# Altium PCB ATmega4809_Curiosity_Nano.PcbDoc (part 2 of 2)
Units mm, origin at the board's own origin, x right, y up, seen from the top; angles counter-clockwise.
Board outline 83.82 x 20.32 mm, 4 copper layers (Top Layer, Gnd Plane, Pwr Plane, Bottom Layer), stack 1.574 mm thick; 77 components, 102 nets, 422 pads, 194 vias.
Unrouted connection lines stored in the file: 1.
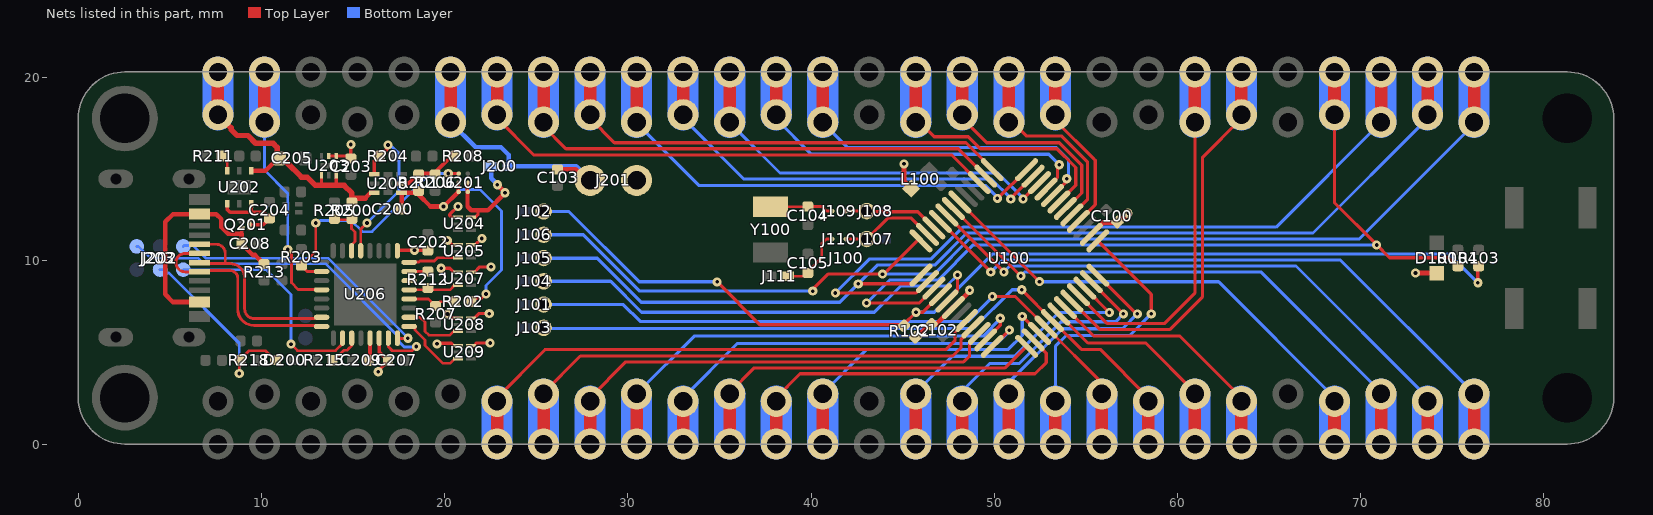
[diagram p4: the nets of this part, all layers, seen from the top]

## Via types
v1: diameter 0.5, hole 0.2, Top Layer to Bottom Layer, 184 vias
v2: diameter 0.5, hole 0.2, Top Layer to Bottom Layer, tented both sides, 8 vias
v3: diameter 0.5, hole 0.2, Top Layer to Bottom Layer, tented top, 2 vias

## Nets (pads, with @x,y where several pads share a name; then routed paths per layer and width w, separated by ;. In a path a pad name is that pad's centre, name@x,y a point inside that pad or via, vN(x,y) a via of type N, cw(c..) or ccw(c..) an arc to the next point about the centre after c; other vN are vias at no path point) (continued)
NetR211_1: R211.1 U202.3 | length 0.9
  Top Layer w0.15: R211.1@7.813,15.725 7.813,15.666 8.135,15.344 U202.3@8.135,14.912
PA0_USART0_TX: J100.7 U100.44 | length 27.6
  Top Layer w0.175: J100.7@22.86,2.54 25.458,5.138 25.489,5.169 47.38,5.169 47.857,5.647 47.857,6.127 47.931,6.201 U100.44@48.479,6.748
PA1_USART0_RX: J100.8 U100.45 | length 25.2
  Top Layer w0.175: J100.8@25.4,2.8 27.413,4.813 47.749,4.813 48.182,5.246 48.182,5.699 48.832,6.349 U100.45@48.832,6.395
PA2_I2C_SDA: J100.9 U100.46 | length 23.1
  Top Layer w0.175: J100.9@27.94,2.54 29.888,4.488 48.332,4.488 48.657,4.813 48.657,5.512 U100.46@49.186,6.041
PA3_I2C_SCL: J100.10 U100.47 | length 23.1
  Top Layer w0.175: U100.47@49.54,5.688 50.334,6.482 v1(50.334,6.875)
  Bottom Layer w0.175: J100.10@30.48,2.743 30.48,2.765 33.615,5.9 49.4,5.9 v1@50.367,6.867
PA4_SPI_MOSI: J100.11 U100.48 | length 20.7
  Top Layer w0.175: U100.48@49.893,5.334 49.941,5.334 v1(50.83,6.223)
  Bottom Layer w0.175: J100.11@33.02,2.54 35.974,5.494 50.158,5.494 v1@50.858,6.195
PA5_SPI_MISO: J100.12 U100.1 | length 17.5
  Top Layer w0.175: J100.12@35.56,2.54 J100.12@35.56,2.743 35.56,2.818 36.904,4.163 50.595,4.163 U100.1@51.767,5.334
PA6_SPI_SCK: J100.13 U100.2 | length 17.1
  Top Layer w0.175: J100.13@38.1,2.54 39.398,3.838 52.229,3.838 52.845,4.454 52.845,4.963 U100.2@52.12,5.688
PA7_SPI_SS: J100.14 U100.3 | length 14.6
  Top Layer w0.175: v1(51.53,6.975) 51.54,6.975 U100.3@52.474,6.041
  Bottom Layer w0.175: J100.14@40.64,2.743 40.64,2.765 43.044,5.169 50.769,5.169 51.53,5.93 v1(51.53,6.975)
PB0_USART3_TX: J100.20 J101.2 U100.4 | length 34.2
  Top Layer w0.15: J101.2@25.4,7.62 J101.2@25.41,7.61
  Top Layer w0.175: v1(49.9,8.056) 51.166,8.056 U100.4@52.828,6.395 55.88,3.342 J100.20@55.88,2.743 J100.20@55.88,2.54
  Bottom Layer w0.175: J101.2@25.4,7.62 29.75,7.62 30.67,6.7 47.442,6.7 48.584,6.7 49.9,8.016 v1(49.9,8.056)
PB1_USART3_RX: J100.21 J103.2 U100.5 | length 36.3
  Top Layer w0.175: v1(51.504,8.425) U100.5@53.181,6.748 54.76,5.169 55.791,5.169 J100.21@58.42,2.54
  Bottom Layer w0.175: J103.2@25.4,6.35 25.432,6.318 48.873,6.318 50.979,8.425 v1(51.504,8.425)
PB2: J100.22 U100.6 | length 9.5
  Top Layer w0.175: U100.6@53.535,7.102 55.114,5.522 58.27,5.522 60.96,2.832 J100.22@60.96,2.743 J100.22@60.96,2.54
PB3: J100.23 U100.7 | length 11.6
  Top Layer w0.175: U100.7@53.888,7.455 55.439,5.905 60.135,5.905 J100.23@63.5,2.54
PB4: J100.34 U100.8 | length 19.1
  Top Layer w0.175: U100.8@54.242,7.809 55.796,6.254 59.579,6.254 61.38,8.055 61.38,15.66 J100.34@63.5,17.78
PB5: J100.35 U100.9 | length 17.2
  Top Layer w0.175: U100.9@54.595,8.162 56.178,6.579 59.292,6.579 60.96,8.247 J100.35@60.96,17.78
PC0_USART1_TX: J100.16 U100.10 | length 14.6
  Top Layer w0.175: U100.10@54.949,8.516 54.962,8.516 v1(56.291,7.187) ; v1@56.291,7.112 v1@56.291,7.174
  Bottom Layer w0.175: J100.16@45.72,2.54 J100.16@45.72,2.743 45.72,2.82 47.7,4.8 51.13,4.8 53.517,7.187 v1(56.291,7.187)
PC1_USART1_RX: J100.17 U100.11 | length 13.6
  Top Layer w0.175: U100.11@55.302,8.87 57.053,7.119 v1(57.053,7.112)
  Bottom Layer w0.175: J100.17@48.26,2.337 48.26,2.902 49.758,4.4 51.37,4.4 53.655,6.685 56.626,6.685 v1(57.053,7.112)
PC2: J100.18 U100.12 | length 12.2
  Top Layer w0.175: U100.12@55.667,9.223 U100.12@55.656,9.223 57.767,7.112 v1(57.815,7.112)
  Bottom Layer w0.175: J100.18@50.8,2.743 50.8,3.37 53.73,6.3 57.003,6.3 v1(57.815,7.112)
PC3: J100.19 U100.13 | length 14.2
  Top Layer w0.175: U100.13@55.656,11.097 58.577,8.176 v1(58.577,7.112)
  Bottom Layer w0.175: J100.19@53.34,2.337 53.34,5.334 53.936,5.93 57.395,5.93 v1(58.577,7.112)
PC4: J100.38 U100.16 | length 7.1
  Top Layer w0.175: J100.38@53.34,17.983 53.34,17.668 55.439,15.569 55.439,15.567 55.514,15.492 55.514,13.076 U100.16@54.595,12.158
PC5: J100.39 U100.17 | length 8.5
  Top Layer w0.175: J100.39@50.8,17.78 51.755,16.825 53.667,16.825 55.1,15.392 55.1,13.369 U100.17@54.242,12.511
PC6: J100.40 U100.18 | length 10.3
  Top Layer w0.175: J100.40@48.26,17.78 49.59,16.45 53.558,16.45 54.775,15.233 54.775,13.711 53.929,12.865 U100.18@53.888,12.865
PC7: J100.41 U100.19 | length 12.1
  Top Layer w0.175: J100.41@45.72,17.78 46.722,16.778 48.594,16.778 49.247,16.125 53.423,16.125 54.366,15.183 54.45,15.098 54.45,14.134 U100.19@53.535,13.218
PD0_AIN0: J100.43 U100.20 | length 16.7
  Top Layer w0.175: U100.20@53.181,13.572 54.012,14.403 54.012,14.507 53.989,14.507 53.968,14.487 v1(53.962,14.487)
  Bottom Layer w0.175: J100.43@40.64,17.577 40.64,17.535 41.975,16.2 53.375,16.2 54.055,15.52 54.055,14.552 54.014,14.512 53.989,14.487 53.968,14.487 v1(53.962,14.487)
PD1_AIN1: J100.44 U100.21 | length 18.1
  Top Layer w0.175: U100.21@52.828,13.925 53.455,14.553 53.455,15.155 v1(53.552,15.252)
  Bottom Layer w0.175: J100.44@38.1,17.747 40.022,15.825 52.979,15.825 v1(53.552,15.252)
PD2_AIN2: J100.45 U100.22 | length 19
  Top Layer w0.175: v1(51.578,13.387) 52.471,14.279 U100.22@52.474,14.279
  Bottom Layer w0.175: J100.45@35.56,17.545 38.305,14.8 50.2,14.8 51.578,13.422 v1(51.578,13.387)
PD3_TCA0WO3: J100.46 U100.23 | length 21.5
  Top Layer w0.175: v1(50.907,13.375) 50.907,13.419 U100.23@52.12,14.632
  Bottom Layer w0.175: J100.46@33.02,17.78 36.325,14.475 49.85,14.475 50.907,13.418 v1(50.907,13.375)
PD4_TCA0WO4: J100.47 U100.24 | length 23.9
  Top Layer w0.175: v1(50.174,13.418) 50.199,13.418 U100.24@51.767,14.986
  Bottom Layer w0.175: J100.47@30.48,17.78 J100.47@30.48,17.577 30.48,17.523 33.891,14.112 49.537,14.112 v1@50.203,13.447
PD5_AIN5: J100.48 U100.25 | length 23.1
  Top Layer w0.175: J100.48@27.94,17.78 29.267,16.453 48.46,16.453 49.893,15.019 U100.25@49.893,14.986
PD6_AIN6: J100.49 U100.26 | length 25.3
  Top Layer w0.175: J100.49@25.4,17.342 26.617,16.125 48.047,16.125 U100.26@49.54,14.632
PD7_AIN7: J100.50 U100.27 | length 27.8
  Top Layer w0.175: J100.50@22.86,17.78 24.855,15.785 47.68,15.785 U100.27@49.22,14.245
PE0: J100.25 U100.30 | length 24.9
  Top Layer w0.175: U100.30@48.125,13.218 v1(52.474,8.87)
  Bottom Layer w0.175: v1(52.474,8.87) 62.25,8.87 J100.25@68.58,2.54
PE1: J100.26 U100.31 | length 28
  Top Layer w0.175: U100.31@47.772,12.865 v1(51.458,9.178)
  Bottom Layer w0.175: v1@51.412,9.132 v1(51.458,9.178) 51.68,9.4 64.55,9.4 71.12,2.83 J100.26@71.12,2.743 J100.26@71.12,2.54
PE2: J100.27 U100.32 | length 30.8
  Top Layer w0.175: U100.32@47.418,12.511 v1(50.529,9.4)
  Bottom Layer w0.175: v1@50.45,9.321 v1(50.529,9.4) 50.854,9.725 66.475,9.725 J100.27@73.66,2.54
PE3: J100.28 U100.33 | length 33.9
  Top Layer w0.175: U100.33@47.065,12.158 49.816,9.406 v1(49.816,9.39)
  Bottom Layer w0.175: v1@49.732,9.306 v1(49.816,9.39) 50.476,10.05 68.893,10.05 J100.28@76.2,2.743 J100.28@76.2,2.54
PF0: J108.2 J109.1 U100.34 | length 5.2
  Top Layer w0.175: J109.1@41.903,12.722 J108.2@43.04,12.722 43.077,12.685 45.83,12.685 U100.34@46.711,11.804
PF0_TOSC1: C104.2 J109.2 Y100.1 | length 3.4
  Top Layer w0.15: Y100.1@37.793,12.956 39.8,12.956 C104.2@39.803,12.953 ; C104.2@39.825,12.976 40.587,12.976 40.841,12.722 J109.2@41.153,12.722
PF1: J107.2 J110.1 U100.35 | length 5.3
  Top Layer w0.175: J110.1@41.903,11.197 J107.2@43.04,11.197 44.183,12.34 45.468,12.34 U100.35@46.358,11.45
PF1_TOSC2: C105.1 J110.2 J111.1 | length 3.7
  Top Layer w0.15: J111.1@38.743,9.166 39.571,9.166 39.825,9.42 40.587,10.182 40.587,10.944 40.84,11.197 J110.2@41.153,11.197
PF2: J100.29 J106.2 U100.36 | length 59.1
  Top Layer w0.175: v1(40.09,8.353) 40.09,8.453 40.92,9.282 v1(43.9,9.282) 43.974,9.282 45.852,11.16 45.94,11.16 U100.36@46.004,11.097
  Bottom Layer w0.175: J106.2@25.4,11.43 27.565,11.43 30.642,8.353 v1(40.09,8.353) ; v1(43.9,9.282) 43.972,9.282 46.717,9.282 48.635,11.2 69.925,11.2 76.2,17.475 J100.29@76.2,17.577 J100.29@76.2,17.78
PF3: J100.30 J105.2 U100.37 | length 57
  Top Layer w0.175: v1(42.58,8.75) 45.531,8.75 U100.37@46.004,9.223
  Bottom Layer w0.175: J105.2@25.4,10.16 25.41,10.15 28.325,10.15 30.725,7.75 41.58,7.75 v1(42.58,8.75) 43.605,9.775 46.75,9.775 48.5,11.525 67.405,11.525 J100.30@73.66,17.78
PF4: J100.31 U100.38 | length 38.9
  Top Layer w0.175: v1(41.33,8.249) 45.737,8.249 U100.38@46.358,8.87
  Bottom Layer w0.175: v1(41.33,8.249) 43.181,10.1 46.54,10.1 48.29,11.85 65.393,11.85 J100.31@71.12,17.577
PF5_LED0: J100.32 R104.1 U100.39 | length 46
  Top Layer w0.175: v1(43.03,7.7) 45.895,7.7 U100.39@46.711,8.516 ; J100.32@68.58,17.78 68.58,13.175 v1(70.88,10.875) 71.58,10.175 74.781,10.175 R104.1@75.3,9.656
  Bottom Layer w0.175: v1(43.03,7.7) 44.287,8.957 46.94,8.957 48.858,10.875 v1(70.88,10.875)
PF6_SW0_RESET: J102.2 R102.1 R103.1 U100.40 | length 58.5
  Top Layer w0.175: v1@34.9,8.859 v1(34.873,8.859) 37.211,6.521 45.019,6.521 R102.1@45.072,6.468 ; R102.1@45.036,6.506 v1(45.73,7.2) 46.102,7.2 U100.40@47.065,8.162 ; v1(76.405,8.81) R103.1@76.405,9.656
  Bottom Layer w0.175: J102.2@25.4,12.7 26.775,12.7 30.616,8.859 v1(34.873,8.859) ; v1(45.73,7.2) 46.73,7.2 49.917,10.388 74.827,10.388 v1(76.405,8.81)
REG_ADJUST: R201.2 R206.2 R208.1 U200.5 | length 3.4
  Top Layer w0.2: U200.5@17.655,14.225 18.03,14.225 18.58,14.775 19.505,14.775 19.505,14.85 R208.1@20.38,15.725
REG_ENABLE: R204.1 U200.1 U206.13 | length 8.9
  Top Layer w0.15: U206.13@15.416,10.556 15.416,11.736 v1(15.755,12.075)
  Top Layer w0.2: U200.1@16.155,14.725 16.155,15.475 16.405,15.725 R204.1@16.373,15.725 ; R204.1@16.455,15.725 16.455,15.73 16.65,15.925 16.655,15.925 16.848,16.118 16.848,16.275 v1(16.905,16.333)
  Bottom Layer w0.15: v1(15.755,12.075) 17.506,13.826 17.506,15.853 17.151,16.207 17.125,16.207 17,16.333 v1(16.905,16.333)
RESERVED: U206.6
S0_0_RX: R212.1 U206.5 U207.3 | length 2.8
  Top Layer w0.15: U206.5@18.06,8.424 20.28,8.424 20.531,8.675 U207.3@20.729,8.675
S0_2_TX: R212.2 U206.7 | length 1
  Top Layer w0.15: U206.7@18.06,9.424 R212.2@19.055,9.424
S0_3_CLK: U205.3 U206.8 | length 2.8
  Top Layer w0.15: U206.8@18.06,9.937 18.595,9.937 18.659,10 19.43,10 19.605,10.175 U205.3@20.729,10.175
S1_0_TX: U206.1 U209.3 | length 3.9
  Top Layer w0.15: U206.1@18.07,6.42 18.33,6.42 18.376,6.374 18.376,6.231 18.93,5.677 18.93,5.389 19.906,4.413 20.291,4.413 20.554,4.675 U209.3@20.729,4.675
S1_1_RX: U206.2 U208.3 | length 3.5
  Top Layer w0.15: U206.2@18.06,6.924 18.666,6.924 18.93,6.66 18.93,6.156 19.136,5.95 20.28,5.95 20.505,6.175 U208.3@20.729,6.175
S\R\S\T\: J202.6 U206.26 | length 12.5
  Top Layer w0.15: v3(11.609,5.458) 11.967,5.1 13.102,5.1 14.05,5.1 14.465,5.515 14.465,5.55 14.47,5.555 U206.26@14.47,5.695
  Bottom Layer w0.15: J202.6@5.73,9.525 10.245,9.524 11.609,8.16 v3(11.609,5.458)
STATUS_LED: R215.2 U206.27 | length 1.7
  Top Layer w0.15: R215.2@13.93,4.575 13.955,4.575 14.455,5.075 14.5,5.12 14.66,5.12 14.765,5.225 14.933,5.393 U206.27@14.933,5.777
SWCLK: J202.1 U206.31 | length 19.9
  Top Layer w0.15: U206.31@16.924,5.787 16.924,5.316 17.14,5.1 18.224,5.1 v1(18.455,5.331)
  Bottom Layer w0.15: J202.1@3.19,10.795 3.285,10.795 3.93,10.15 6.536,10.15 6.833,9.853 13.496,9.853 17.514,5.835 17.514,5.587 17.792,5.309 18.433,5.309 v1(18.455,5.331)
SWDIO: J202.5 U206.32 | length 14.9
  Top Layer w0.15: U206.32@17.42,5.77 17.975,5.77 v1(17.989,5.784)
  Bottom Layer w0.15: J202.5@5.73,10.795 5.778,10.843 6.267,10.843 6.958,10.153 13.62,10.153 v1(17.989,5.784)
UPDI: J104.2 U100.41 | length 25.8
  Top Layer w0.175: U100.41@47.418,7.809 48,8.391 v1(48,9.233)
  Bottom Layer w0.175: J104.2@25.4,8.89 29.058,8.89 30.748,7.2 43.461,7.2 44.893,8.632 47.399,8.632 v1(48,9.233)
USBD_N: J203.A7 J203.B7 U206.23 | length 13
  Top Layer w0.16: J203.B7@6.665,10.91 6.669,10.914 7.523,10.914 ; U206.23@13.27,6.92 12.946,6.92 12.886,6.86 9.59,6.86 ; J203.A7@6.725,9.85 cw(c6.725,9.91) 6.665,9.91 ccw(c6.725,9.91) J203.A7@6.725,9.85 ; J203.A7@6.725,9.85 8.025,9.85 ; 7.522,10.914 cw(c7.522,10.414) 8.022,10.414 ; 7.522,10.914 cw(c7.522,10.414) 8.022,10.414 ; 8.022,10.414 8.022,9.852 8.025,9.85 ; 8.025,9.85 8.296,9.85 cw(c8.296,9.063) 9.083,9.063 9.083,7.366 ; 9.083,7.366 ccw(c9.59,7.366) 9.59,6.86 ; 9.083,7.366 ccw(c9.59,7.366) 9.59,6.86
USBD_P: J203.A6 J203.B6 U206.24 | length 15.3
  Top Layer w0.16: 5.327,9.912 cw(c5.827,9.912) 5.827,10.412 J203.A6@6.665,10.412 ; U206.24@13.27,6.42 12.946,6.42 12.886,6.48 9.59,6.48 ; 5.827,9.408 cw(c5.827,9.908) 5.327,9.908 ccw(c5.827,9.908) 5.827,9.408 ; 5.827,9.408 6.665,9.408 J203.B6@6.665,9.41 ; J203.B6@6.665,9.41 cw(c6.725,9.41) J203.B6@6.725,9.47 ; J203.B6@6.665,9.41 cw(c6.725,9.41) J203.B6@6.725,9.47 ; J203.B6@6.725,9.47 8.296,9.47 ; 8.296,9.47 cw(c8.296,9.063) 8.703,9.063 ; 8.296,9.47 cw(c8.296,9.063) 8.703,9.063 ; 8.703,7.366 ccw(c9.59,7.366) 9.59,6.48 ; 8.703,7.366 ccw(c9.59,7.366) 9.59,6.48 ; 8.703,7.366 8.703,9.063
V\O\F\F\: J100.55 U206.20 | length 11.2
  Top Layer w0.15: v1(11.433,10.628) 11.433,10.573 11.635,10.371 11.635,8.815 12.003,8.447 12.873,8.447 12.88,8.439 13.251,8.439 U206.20@13.27,8.42
  Bottom Layer w0.15: J100.55@10.16,17.577 10.16,14.958 11.433,13.686 v1(11.433,10.628)
VBUS: C208.1 J203.A4/B9 J203.B4/A9 Q201.2 R213.1 | length 13.6
  Top Layer w0.2: 8.927,11.475 Q201.2@8.927,11.715
  Top Layer w0.25: J203.B4/A9@6.675,7.76 6.665,7.76 5.16,7.76 4.74,8.18 4.74,12.131 5.169,12.56 6.665,12.56 7.528,12.56 7.813,12.275 7.813,11.832 8.171,11.475 8.927,11.475 C208.1@8.927,10.94 ; C208.1@8.918,10.931 8.918,10.912 9.067,10.763 9.085,10.763 9.523,10.325 9.644,10.325 9.976,9.992 9.976,9.974 10.121,9.829 R213.1@10.139,9.829
VBUS_ADC: R200.2 R205.2 U206.14 | length 2.8
  Top Layer w0.15: R205.2@13.979,12.25 14.916,12.25 14.916,11.764 15.105,11.575 15.105,11.068 14.916,10.879 U206.14@14.916,10.556
VBUS_DELAYED: C204.2 Q201.3 U202.4 U202.6 | length 4.5
  Top Layer w0.2: U202.4@8.135,13.129 8.135,13.054 8.135,12.803 8.286,12.652 10.108,12.652 10.266,12.494 10.266,12.476 C204.2@10.415,12.327 ; Q201.3@9.41,11.975 10.082,11.975 10.266,12.16 10.266,12.178 C204.2@10.415,12.327 ; U202.6@9.435,13.129 9.435,12.669 9.437,12.667 ; C204.2@10.434,12.327 C204.2@10.415,12.327
VCC_EDGE: C103.2 J100.51 J200.2 J201.1 | length 11.5
  Top Layer w0.25: C103.2@26.162,15.004 27.163,15.004 27.766,14.402 J201.1@27.94,14.402 ; J201.1@27.786,14.402 J201.1@27.94,14.402
  Bottom Layer w0.25: J100.51@20.32,17.577 21.694,16.203 23.074,16.203 23.49,15.787 J200.2@23.49,15.162 27.18,15.162 J201.1@27.94,14.402
VCC_LEVEL: J200.1 U201.A1 U201.B1 U204.6 U205.6 U207.6 U208.6 U209.6 | length 10.5
  Top Layer w0.175: U209.6@21.429,5.375 21.605,5.375 21.755,5.525 v1(22.48,5.525) ; U208.6@21.429,6.875 21.605,6.875 21.855,7.125 v1(22.43,7.125) ; U207.6@21.429,9.375 21.442,9.388 21.627,9.388 21.915,9.675 v1(22.53,9.675) ; U205.6@21.429,10.875 21.68,10.875 v1(22.03,11.225) ; U204.6@21.429,12.375 21.442,12.388 21.677,12.388 21.815,12.525 21.815,12.767
  Top Layer w0.2: U201.A1@21.242,13.775 U201.B1@21.242,14.267
  Top Layer w0.225: 21.242,12.963 21.242,13.759 U201.A1@21.242,13.775
  Top Layer w0.25: 21.254,12.963 21.449,12.767 21.815,12.767 22.362,12.767 23.29,13.695 v1(23.29,13.725) 23.29,13.745 v1(22.876,14.159)
  Bottom Layer w0.25: J200.1@22.54,15.162 22.54,14.525 22.876,14.189 v1(22.876,14.159)
VCC_MCU_CORE: C209.2 U206.29 | length 1.2
  Top Layer w0.2: C209.2@15.88,4.575 15.924,4.619 U206.29@15.924,5.787
VCC_P3V3: C202.2 C203.2 C207.1 D200.2 J202.4 R218.2 U203.1 U203.2 U204.1 U205.1 U206.9 U206.30 U207.1 U208.1 U209.1 | length 21.7
  Top Layer w0.15: v1(8.785,3.855) 8.785,4.511 R218.2@8.848,4.575 8.848,4.625 9.323,5.1 10.214,5.1 10.54,4.774 10.54,4.75 10.715,4.575 D200.2@10.765,4.575
  Top Layer w0.175: U203.2@13.679,15.725 14.779,15.725 C203.2@14.879,15.625 ; v1(19.581,5.475) 19.613,5.507 20.363,5.507 20.483,5.388 20.717,5.388 20.729,5.375 U209.1@20.508,5.375 ; v1(19.804,9.6) 20.28,9.6 20.505,9.375 U207.1@20.729,9.375 ; v1(20.139,11.125) 20.389,10.875 U205.1@20.729,10.875 ; v1(20.155,7.1) 20.38,6.875 U208.1@20.729,6.875 ; U204.1@20.729,12.375 20.383,12.375 20.28,12.478 20.28,12.541 20.712,12.973 v1(20.729,12.973)
  Top Layer w0.2: C203.2@14.879,15.6 v1(14.879,16.357) ; v1(16.375,3.95) 16.375,4.009 16.905,4.539 C207.1@16.905,4.575 ; U206.30@16.424,5.787 16.424,5.031 C207.1@16.88,4.575 ; U206.9@17.416,10.581 v1(18.355,10.581) 18.969,10.581 C202.2@19.055,10.495
  Bottom Layer w0.15: J202.4@4.46,9.525 4.636,9.525 4.813,9.348 4.946,9.348 8.786,5.508 v1(8.785,3.855)
VCC_REGULATOR: C200.2 R201.1 R202.2 U200.4 U201.A2 U201.B2 | length 23.7
  Top Layer w0.175: R202.2@21.579,7.875 21.653,7.95 22.005,7.95 v1(22.255,8.2) ; v1@22.305,8.175 v1@22.33,8.2
  Top Layer w0.2: R201.1@18.58,13.62 R201.1@18.58,13.775 ; U201.A2@20.742,13.775 U201.B2@20.742,14.275
  Top Layer w0.225: v1(19.94,12.973) U201.A2@20.742,13.775
  Top Layer w0.24: C200.2@17.655,13.02 U200.4@17.655,13.725 18.53,13.725 R201.1@18.58,13.775
  Top Layer w0.25: R201.1@18.58,13.62 19.227,12.973 v1(19.94,12.973)
  Bottom Layer w0.15: 20.867,13.9 v1(19.94,12.973) 20.867,13.9 ; 20.867,13.9 21.927,13.9 ; 20.867,13.9 21.927,13.9 ; 21.927,13.9 23.105,12.722 ; 21.927,13.9 23.105,12.722 ; 22.255,8.654 v1(22.255,8.2) 22.255,8.654 ; 22.255,8.654 23.105,9.504 ; 22.255,8.654 23.105,9.504 ; 23.105,9.504 23.105,12.722 ; 23.105,9.504 23.105,12.722
VCC_TARGET: C100.1 C102.2 D100.2 J201.2 L100.1 R102.2 U100.14 U100.42 | length 9.9
  Top Layer w0.27: v1(45.08,15.298) 45.08,14.337 L100.1@45.462,13.955 ; R102.2@45.744,5.796 C102.2@46.506,6.559 ; C102.2@46.575,6.541 46.831,6.541 U100.42@47.746,7.455 ; U100.42@47.772,7.455 48.657,8.341 v1(48.657,8.404) ; U100.14@55.302,11.45 55.947,12.095 56.817,12.095 56.817,12.097 v1@57.34,12.62 ; C100.1@56.789,12.075 56.789,12.077 v1(57.312,12.6) ; v1(73,9.341) 74.162,9.341 D100.2@74.168,9.335
VCC_VBUS: C205.2 J100.56 R200.1 U200.3 U202.1 U203.4 U203.6 | length 14
  Top Layer w0.175: 13.279,14.151 U203.4@13.279,14.675 ; 14.079,14.151 U203.6@14.079,14.675
  Top Layer w0.24: 15.655,13.425 15.955,13.725 U200.3@16.155,13.725
  Top Layer w0.25: U202.1@9.455,14.928 10.218,14.928 C205.2@10.858,15.569
  Top Layer w0.3: J100.56@7.62,17.983 8.34,17.263 8.34,17.171 8.662,16.849 9.26,16.849 9.683,16.426 10.629,16.426 10.858,16.197 10.858,15.597 10.909,15.546 11.067,15.388 11.358,15.388 12.175,14.571 12.493,14.571 12.939,14.125 14.504,14.125 14.929,13.7 R200.1@14.929,13.425 ; R200.1@14.929,13.25 R200.1@14.929,13.425 ; 15.655,13.425 R200.1@14.929,13.425
VTG_ADC: R202.1 R207.2 U206.4 | length 2.7
  Top Layer w0.15: U206.4@18.06,7.924 19.11,7.924 R207.2@19.505,7.529 ; R207.2@19.543,7.561 19.756,7.775 R202.1@20.579,7.775
VTG_EN: R203.1 U201.C2 U206.18 | length 13.3
  Top Layer w0.15: v1(12.965,12.075) 12.965,10.534 R203.1@12.175,9.744 12.499,9.42 U206.18@13.27,9.42 ; v1(20.199,14.775) U201.C2@20.742,14.775
  Bottom Layer w0.15: v1(12.965,12.075) 13.06,12.075 13.195,12.211 14.894,12.211 15.505,11.6 16.03,11.6 19.205,14.775 v1(20.199,14.775)
pads on no net: J100.1 J109.5 J110.5 J202.3 J203.0 J203.A8 J203.B8 Q200.0 Q201.0 U202.0 U203.5

## Polygon pours and split planes (outlines as drawn)
GND on Bottom Layer "Bottom Layer-GND" (solid, remove dead copper, pour order 1): 83.82,20.32 83.82,0 0,0 0,20.32
GND on Top Layer "Top Layer-GND" (solid, remove dead copper, pour order 0): 83.82,20.32 83.82,0 0,0 0,20.32
VCC_P3V3 on Pwr Plane (split plane): 2.54,19.81 21.461,19.81 21.461,14.6 21.461,4.95 21.461,0.51 2.54,0.51 2.524,0.509 2.341,0.518 2.144,0.547 1.95,0.596 1.762,0.663 1.582,0.748 1.411,0.851 1.251,0.969 1.103,1.103 0.969,1.251 0.851,1.411 0.748,1.582 0.663,1.762 0.596,1.95 0.547,2.144 0.518,2.341 0.509,2.524 0.51,2.54 0.51,17.78 0.509,17.796 0.518,17.979 0.547,18.176 0.596,18.37 0.663,18.558 0.748,18.738 0.851,18.909 0.969,19.069 1.103,19.217 1.251,19.351 1.411,19.469 1.582,19.572 1.762,19.657 1.95,19.724 2.144,19.773 2.341,19.802 2.524,19.811
VCC_TARGET on Pwr Plane (split plane): 81.479,19.802 81.676,19.773 81.87,19.724 82.058,19.657 82.238,19.572 82.409,19.469 82.569,19.351 82.717,19.217 82.851,19.069 82.969,18.909 83.072,18.738 83.157,18.558 83.224,18.37 83.273,18.176 83.302,17.979 83.311,17.796 83.31,17.78 83.31,2.54 83.311,2.524 83.302,2.341 83.273,2.144 83.224,1.95 83.157,1.762 83.072,1.582 82.969,1.411 82.851,1.251 82.717,1.103 82.569,0.969 82.409,0.851 82.238,0.748 82.058,0.663 81.87,0.596 81.676,0.547 81.479,0.518 81.296,0.509 81.28,0.51 21.719,0.51 21.719,4.821 24.255,4.821 24.305,4.83 24.347,4.858 24.375,4.9 24.384,4.95 24.384,14.6 24.375,14.65 24.347,14.692 24.305,14.72 24.255,14.729 21.719,14.729 21.719,19.81 81.28,19.81 81.296,19.811
VCC_LEVEL on Pwr Plane (split plane): 24.126,5.079 21.719,5.079 21.719,14.47 24.126,14.47
GND on Gnd Plane (split plane): 81.479,19.802 81.676,19.773 81.87,19.724 82.058,19.657 82.238,19.572 82.409,19.469 82.569,19.351 82.717,19.217 82.851,19.069 82.969,18.909 83.072,18.738 83.157,18.558 83.224,18.37 83.273,18.176 83.302,17.979 83.311,17.796 83.31,17.78 83.31,2.54 83.311,2.524 83.302,2.341 83.273,2.144 83.224,1.95 83.157,1.762 83.072,1.582 82.969,1.411 82.851,1.251 82.717,1.103 82.569,0.969 82.409,0.851 82.238,0.748 82.058,0.663 81.87,0.596 81.676,0.547 81.479,0.518 81.296,0.509 81.28,0.51 2.54,0.51 2.524,0.509 2.341,0.518 2.144,0.547 1.95,0.596 1.762,0.663 1.582,0.748 1.411,0.851 1.251,0.969 1.103,1.103 0.969,1.251 0.851,1.411 0.748,1.582 0.663,1.762 0.596,1.95 0.547,2.144 0.518,2.341 0.509,2.524 0.51,2.54 0.51,17.78 0.509,17.796 0.518,17.979 0.547,18.176 0.596,18.37 0.663,18.558 0.748,18.738 0.851,18.909 0.969,19.069 1.103,19.217 1.251,19.351 1.411,19.469 1.582,19.572 1.762,19.657 1.95,19.724 2.144,19.773 2.341,19.802 2.524,19.811 2.54,19.81 81.28,19.81 81.296,19.811

## Keep-outs
Top Layer:
  region: 39.36,8.619 39.36,9.712 37.176,9.712 37.176,8.619
  region: 38.743,9.906 38.743,13.511 36.843,13.511 36.843,9.906
  lines w0.159: 48.862,7.666 48.927,7.61 ; 49.048,13.003 49.157,13.109 ; 54.242,11.266 54.412,11.083 ; 56.2,13.085 56.336,12.952
Bottom Layer:
  rectangle: 27.94,13.552 30.48,15.252
  region: 23.655,14.69 23.655,15.666 22.282,15.666 22.282,14.69
Keep-Out Layer:
  text "'.Layer_Name'" at 174.01,-104.74 h1.5

## Other copper
Top Layer:
  region net GND: 19.741,6.67 19.768,6.697 19.798,6.702 19.809,6.678 19.821,6.662 19.835,6.642 19.845,6.632 19.863,6.618 19.886,6.613 19.901,6.616 19.912,6.604 19.916,6.584 19.881,6.538 19.756,6.522 19.711,6.568
  region net VTG_ADC: 19.795,7.658 19.774,7.712 19.88,7.706 19.853,7.699 19.831,7.69 19.813,7.675
  region net GND: 18.724,11.343 18.794,11.413 18.825,11.343
  pour cut-out: 38.844,13.425 38.844,10.493 42.186,10.493 42.186,13.425
  text ".ProjectPCBFabRevision" at 209.188,-104.562 h1.5
  text "'.Layer_Name'" at 174.01,-104.74 h1.5
Bottom Layer:
  pour cut-out: 42.344,13.383 42.344,10.548 44.525,10.548 44.525,13.383
  pour cut-out: 25.99,13.356 25.99,5.694 23.875,5.694 23.875,13.356
  text ".ProjectPCBFabRevision" at 209.188,-104.562 h1.5
  text ".ProjectPCBFabRevision" at 209.188,-104.562 h1.5
  text ".ProjectPCBFabRevision" at 209.188,-104.562 h1.5
  text "'.Layer_Name'" at 174.01,-104.74 h1.5
Gnd Plane (plane layer: these items are gaps in the copper):
  text ".ProjectPCBFabRevision" at 209.188,-104.562 h1.5
  text "'.Layer_Name'" at 174.01,-104.74 h1.5
Pwr Plane (plane layer: these items are gaps in the copper):
  lines w0.254: 21.59,0.016 21.59,4.95 ; 21.59,20.32 21.59,14.6 ; 21.59,4.95 21.59,14.6 ; 21.59,4.95 24.255,4.95 24.255,14.6 21.59,14.6
  text ".ProjectPCBFabRevision" at 209.188,-104.562 h1.5
  text "'.Layer_Name'" at 174.01,-104.74 h1.5

## Silkscreen, mask and mechanical layers (free items; w line width, h text height)
Top Overlay:
  lines w0.15: 6.699,3.989 21.364,3.989 ; 6.699,16.306 21.391,16.306 ; 17.525,16.75 18.025,16.75 ; 18.975,16.75 19.475,16.75 ; 19.225,16.5 19.225,17
  text "GND" at 5.497,16.58 h0.9 r90
  text "PD7" at 21.911,16.084 h0.75
  text "PD5" at 26.94,16.074 h0.75
  text "PD3" at 32.02,16.074 h0.75
  text "PD1" at 37.225,16.074 h0.75
  text "GND" at 42.18,16.074 h0.75
  text "PC6" at 47.26,16.074 h0.75
  text "PC4" at 52.34,16.074 h0.75
  text "PF0" at 57.42,16.074 h0.75
  text "PB4" at 62.5,16.074 h0.75
  text "PF5" at 67.58,16.074 h0.75
  text "PF3" at 72.66,16.074 h0.75
  text "PD6" at 24.4,15.677 h0.75
  text "PD4" at 29.48,15.677 h0.75
  text "PD2" at 34.56,15.677 h0.75
  text "PD0" at 39.64,15.677 h0.75
  text "PC7" at 44.72,15.677 h0.75
  text "PC5" at 49.8,15.677 h0.75
  text "PF1" at 55.005,15.677 h0.75
  text "PB5" at 59.96,15.677 h0.75
  text "GND" at 65.04,15.677 h0.75
  text "PF4" at 70.12,15.677 h0.75
  text "PF2" at 75.2,15.677 h0.75
  text "SW0" at 79.391,14.709 h0.75
  text "POWER" at 27.461,12.5 h0.75
  text "LED0" at 72.936,12.452 h0.75
  text "32kHz" at 36.3,9.8 h0.9 r90
  text "C" at 58.59,8.485 h6
  text "PF5" at 73.311,7.4 h0.75
  text "DEBUGGER" at 8.31,6.697 h0.75 r90
  text "ATmega4809" at 55.285,5.555 h1
  text "PS" at 10.66,5.175 h0.75
  text "PF6" at 79.391,5.025 h0.75
  text "'.ProjectTargetName' / CURIOSITY NANO" at 24.816,4.791 h1.35 r90
  text "PA1" at 24.525,3.913 h0.75
  text "PA3" at 29.48,3.913 h0.75
  text "PA5" at 34.56,3.913 h0.75
  text "PA7" at 39.64,3.913 h0.75
  text "PC0" at 44.72,3.913 h0.75
  text "PC2" at 49.8,3.913 h0.75
  text "PB0" at 54.88,3.913 h0.75
  text "PB2" at 59.96,3.913 h0.75
  text "GND" at 65.04,3.913 h0.75
  text "PE1" at 70.245,3.913 h0.75
  text "PE3" at 75.2,3.913 h0.75
  text "PA0" at 21.86,3.534 h0.75
  text "PA2" at 26.94,3.534 h0.75
  text "PA4" at 32.02,3.534 h0.75
  text "PA6" at 37.1,3.534 h0.75
  text "GND" at 42.18,3.534 h0.75
  text "PC1" at 47.385,3.534 h0.75
  text "PC3" at 52.34,3.534 h0.75
  text "PB1" at 57.545,3.534 h0.75
  text "PB3" at 62.5,3.534 h0.75
  text "PE0" at 67.58,3.534 h0.75
  text "PE2" at 72.66,3.534 h0.75
  text "1" at 27.307,2.278 h10
  text "GND" at 5.497,1.34 h0.9 r90
  text ".ProjectPCBFabRevision" at 209.188,-104.562 h1.5
  text "'.Layer_Name'" at 174.01,-104.74 h1.5
Bottom Overlay:
  lines w0.15: 23.815,5.625 23.815,13.42 ; 26.115,5.625 26.115,13.42 ; 27.365,13.42 26.115,13.42 20.54,13.42 20.54,5.625 29.165,5.625 29.165,13.42 28.515,13.42
  lines w0.2: 47.099,10.697 47.099,13.121 ; 47.1,11.909 49.313,14.122 54.722,14.122 ; 55.6,15 54.722,14.122 ; 57.8,15 56.922,14.122 54.722,14.122
  text "GND" at 5.497,18.98 h0.9 r90
  text "VBUS" at 7.995,16.722 h0.75 r90
  text "PD7" at 23.86,16.074 h0.75
  text "PD5" at 28.94,16.074 h0.75
  text "PD3" at 34.02,16.074 h0.75
  text "PD1" at 38.975,16.074 h0.75
  text "GND" at 44.18,16.074 h0.75
  text "PC6" at 49.26,16.074 h0.75
  text "PC4" at 54.34,16.074 h0.75
  text "PF0" at 59.42,16.074 h0.75
  text "PB4" at 64.5,16.074 h0.75
  text "PF5" at 69.58,16.074 h0.75
  text "PF3" at 74.66,16.074 h0.75
  text "D3" at 13.325,15.972 h0.75
  text "GND" at 18.78,15.972 h0.75
  text "VOFF" at 11.535,15.693 h0.75
  text "D0" at 15.865,15.693 h0.75
  text "VTG" at 21.32,15.693 h0.75
  text "PD6" at 26.4,15.677 h0.75
  text "PD4" at 31.48,15.677 h0.75
  text "PD2" at 36.56,15.677 h0.75
  text "PD0" at 41.64,15.677 h0.75
  text "PC7" at 46.72,15.677 h0.75
  text "PC5" at 51.8,15.677 h0.75
  text "PF1" at 56.755,15.677 h0.75
  text "PB5" at 61.96,15.677 h0.75
  text "GND" at 67.04,15.677 h0.75
  text "PF4" at 72.12,15.677 h0.75
  text "PF2" at 77.2,15.677 h0.75
  text "CONNECTIONS" at 26.711,13.774 h0.7
  text "Microchip © 2024" at 82.018,13.061 h2
  text "DEBUGGER" at 20.205,12.397 h0.75 r90
  text "D3" at 23.485,12.335 h0.75
  text "PF6" at 28.848,12.335 h0.75
  text "PF0" at 46.705,12.254 h0.75
  text "TARGET" at 30.265,11.647 h0.75 r90
  text "D2" at 23.485,11.06 h0.75
  text "PF2" at 28.848,11.06 h0.75
  text "PF1" at 46.705,10.825 h0.75
  text "C" at 18.974,10.414 h9.7
  text "D1" at 23.485,9.785 h0.75
  text "PF3" at 28.848,9.785 h0.75
  text "D0" at 23.485,8.51 h0.75
  text "UPDI" at 28.848,8.51 h0.75
  text "CDC" at 21.719,7.985 h0.75 r90
  text "RX" at 23.485,7.235 h0.75
  text "PB0" at 28.848,7.235 h0.75
  text "1" at 62.597,7.024 h5
  text "4" at 36.665,7.021 h5
  text "GND" at 11.5,6.655 h0.75
  text "TX" at 23.485,5.96 h0.75
  text "PB1" at 28.848,5.96 h0.75
  text "" at 17.247,5.918 h5
  text "BOOT" at 11.5,5.41 h0.75
  text "'.ProjectPCBFabNumber' Rev'.ProjectPCBFabRevision'" at 81.718,5.376 h2
  text "CDC" at 14.955,4.825 h0.75
  text "ID" at 10.722,3.913 h0.75
  text "TX" at 15.865,3.913 h0.75
  text "D2" at 20.945,3.913 h0.75
  text "PA1" at 26.275,3.913 h0.75
  text "PA3" at 31.48,3.913 h0.75
  text "PA5" at 36.56,3.913 h0.75
  text "PA7" at 41.64,3.913 h0.75
  text "PC0" at 46.72,3.913 h0.75
  text "PC2" at 51.8,3.913 h0.75
  text "PB0" at 56.88,3.913 h0.75
  text "PB2" at 61.96,3.913 h0.75
  text "GND" at 67.04,3.913 h0.75
  text "PE1" at 71.995,3.913 h0.75
  text "PE3" at 77.2,3.913 h0.75
  text "GND" at 5.497,3.74 h0.9 r90
  text "NC" at 8.245,3.534 h0.75
  text "RX" at 13.325,3.534 h0.75
  text "D1" at 18.28,3.534 h0.75
  text "PA0" at 23.86,3.534 h0.75
  text "PA2" at 28.94,3.534 h0.75
  text "PA4" at 34.02,3.534 h0.75
  text "PA6" at 39.1,3.534 h0.75
  text "GND" at 44.18,3.534 h0.75
  text "PC1" at 49.135,3.534 h0.75
  text "PC3" at 54.34,3.534 h0.75
  text "PB1" at 59.295,3.534 h0.75
  text "PB3" at 64.5,3.534 h0.75
  text "PE0" at 69.58,3.534 h0.75
  text "PE2" at 74.66,3.534 h0.75
  text ".ProjectPCBFabRevision" at 209.188,-104.562 h1.5
  text "'.Layer_Name'" at 174.01,-104.74 h1.5
Top Paste:
  text ".ProjectPCBFabRevision" at 209.188,-104.562 h1.5
  text "'.Layer_Name'" at 174.01,-104.74 h1.5
Bottom Paste:
  text ".ProjectPCBFabRevision" at 209.188,-104.562 h1.5
  text "'.Layer_Name'" at 174.01,-104.74 h1.5
Top Solder:
  text ".ProjectPCBFabRevision" at 209.188,-104.562 h1.5
  text "'.Layer_Name'" at 174.01,-104.74 h1.5
Bottom Solder:
  text ".ProjectPCBFabRevision" at 209.188,-104.562 h1.5
  text "'.Layer_Name'" at 174.01,-104.74 h1.5
Board (M1):
  the board outline again, w0.1
  text "'.Layer_Name'" at 192.01,-104.74 h1.5
Top Assembly:
  text "ASSEMBLY VARIANT:" at 146.01,-88.74 h0.9
  text "'.VariantName'" at 160.26,-88.74 h0.9
  text "DOCUMENT NUMBER:" at 192.26,-96.99 h1.15
  text "'.ProjectPCBAssyNumber'_ASSY-D" at 192.51,-99.99 h1.38
  text ".ProjectPCBAssyRevision" at 209.188,-104.562 h1.5
  text ".ProjectPCBFabRevision" at 209.188,-104.562 h1.5
  text "'.Layer_Name'" at 174.01,-104.74 h1.5
Bottom Assembly:
  text "'.VariantName'" at -76.44,-88.74 h0.9
  text "ASSEMBLY VARIANT:" at -62.19,-88.74 h0.9
  text "DOCUMENT NUMBER:" at -108.44,-96.99 h1.15
  text "'.ProjectPCBAssyNumber'_ASSY-D" at -108.69,-99.99 h1.38
  text ".ProjectPCBAssyRevision" at -125.368,-104.562 h1.5
  text "'.Layer_Name'" at -90.49,-104.74 h1
  text "'.Layer_Name'" at 174.01,-104.74 h1.5
Notes (M4):
  lines w0.1: -2.5,-2.5 86.32,-2.5 86.32,22.82 -2.5,22.82 -2.5,-2.5
Bottom 3D Body:
  text "'.Layer_Name'" at 174.01,-104.74 h1.15
Top 3D Body:
  text "'.Layer_Name'" at 174.01,-104.74 h1.2
Bottom Courtyard:
  text ".ProjectPCBFabRevision" at 209.188,-104.562 h1.5
  text "'.Layer_Name'" at 174.01,-104.74 h1
Top Courtyard:
  text ".ProjectPCBFabRevision" at 209.188,-104.562 h1.5
  text "'.Layer_Name'" at 174.01,-104.74 h1.1
TITLE (M16):
  lines w0.1: 145.51,-87.49 227.33,-87.49 ; 197.51,-79.99 197.51,-82.99 227.33,-82.99 ; 216.05,-104.625 216.05,-103.355 ; 216.05,-103.99 226.21,-103.99 ; 216.21,-102.79 216.21,-101.79 ; 216.21,-102.29 226.21,-102.29 ; 218.59,-104.625 218.59,-103.355 ; 221.13,-104.625 221.13,-103.355 ; 221.21,-102.59 221.21,-101.99 ; 223.67,-104.625 223.67,-103.355 ; 226.21,-104.625 226.21,-103.355 ; 226.21,-102.79 226.21,-101.79 ; 227.33,-82.99 227.33,-82.99
  lines w0.127: -148.59,-50.165 -143.51,-50.165 ; -148.59,10.16 -143.51,10.16 ; -148.59,70.485 -143.51,70.485 ; -85.09,-110.49 -85.09,-105.41 ; -85.09,125.73 -85.09,130.81 ; -21.59,-110.49 -21.59,-105.41 ; -21.59,125.73 -21.59,130.81 ; 41.91,-110.49 41.91,-105.41 ; 41.91,125.73 41.91,130.81 ; 77.47,-105.41 113.03,-105.41 ; 105.41,-110.49 105.41,-105.41 ; 105.41,125.73 105.41,130.81 ; 145.51,-105.41 145.51,-79.99 ; 145.51,-100.99 227.33,-100.99 ; 145.51,-94.99 227.33,-94.99 ; 145.51,-88.99 227.33,-88.99 ; 168.91,-110.49 168.91,-105.41 ; 168.91,125.73 168.91,130.81 ; 173.51,-105.41 173.51,-88.99 ; 191.51,-100.99 191.51,-94.99 ; 204.51,-105.41 204.51,-100.99 ; 212.01,-105.41 212.01,-94.99 ; 227.33,-74.93 227.33,-105.41 ; 227.33,-50.165 232.41,-50.165 ; 227.33,10.16 232.41,10.16 ; 227.33,70.485 232.41,70.485 ; 227.33,-105.41 227.33,-79.99 111.51,-79.99 111.51,-105.41 227.33,-105.41 ; 227.33,-105.41 -143.51,-105.41 -143.51,125.73 227.33,125.73 227.33,-105.41 ; -148.59,-110.49 232.41,-110.49 232.41,130.81 -148.59,130.81 -148.59,-110.49
  lines w0.254: 116.83,116.73 116.83,121.23 116.83,125.73 ; 129.33,116.73 129.33,121.23 129.33,125.73 ; 207.83,116.73 207.83,121.23 207.83,125.73 ; 227.33,121.23 105.83,121.23 ; 105.83,121.23 105.83,125.73 227.33,125.73 227.33,116.73 105.83,116.73 105.83,121.23
  text "1" at -117.314,127.508 h1.78
  text "2" at -53.924,127.508 h1.78
  text "3" at 9.305,127.508 h1.78
  text "4" at 72.974,127.508 h1.78
  text "5" at 136.449,127.508 h1.78
  text "6" at 200.076,127.508 h1.78
  text "REV" at 108.33,122.73 h1.52
  text "ECO" at 118.33,122.73 h1.52
  text "Comments" at 164.83,122.23 h1.52
  text "Date" at 212.83,122.23 h1.52
  text "A" at -146.685,98.476 h1.78
  text "A" at 229.235,98.476 h1.78
  text "B" at -146.685,38.024 h1.78
  text "B" at 229.235,38.024 h1.78
  text "C" at -146.685,-22.301 h1.78
  text "C" at 229.235,-22.301 h1.78
  text "PART NUMBER:" at 198.51,-81.99 h1
  text "'.ProjectpartNumber'" at 210.51,-82.24 h1.5
  text "D" at -146.685,-82.499 h1.78
  text "TITLE:" at 146.51,-82.49 h1.14
  text "D" at 229.235,-82.499 h1.78
  text "'.ProjectTitle'" at 146.51,-86.49 h2.5
  text "PCB Layout Contact:" at 146.51,-90.99 h1.15
  text "GERBER FILE:" at 174.51,-90.99 h1.15
  text ".ProjectContactPCB" at 146.51,-93.99 h1.6
  text "'.Plot_File_Name'" at 174.51,-93.99 h1.5
  text "M" at 114.51,-95.99 h15.24
  text "Project Owner:" at 146.51,-96.99 h1.15
  text "PCB NUMBER:" at 174.51,-96.99 h1.15
  text "DATE:" at 213.21,-96.99 h1.14
  text "Microchip Technology Inc." at 113.28,-99.25 h1.78
  text ".ProjectContactOwner" at 146.51,-99.99 h1.6
  text ".ProjectPCBFabNumber" at 174.51,-99.99 h1.6
  text "'.PRINT_DATE'" at 213.21,-99.99 h1.5
  text "2355 W. Chandler Blvd." at 114.51,-101.99 h1.78
  text "LAYER NAME:" at 174.51,-102.49 h1.14
  text "10mm" at 212.51,-102.59 h0.7
  text "PCB FILE NAME:" at 146.51,-102.74 h1.15
  text "REV:" at 205.26,-102.74 h1.14
  text "400mil" at 212.41,-104.29 h0.7
  text "Chandler, AZ  85224" at 115.51,-104.49 h1.78
  text "'.PCB_FILE_NAME_NO_PATH'" at 146.51,-104.74 h1
  text "1" at -117.314,-108.712 h1.78
  text "2" at -53.924,-108.712 h1.78
  text "3" at 9.305,-108.712 h1.78
  text "4" at 72.974,-108.712 h1.78
  text "5" at 136.449,-108.712 h1.78
  text "6" at 200.076,-108.712 h1.78
Drill Drawing:
  text "DOCUMENT NUMBER:" at 192.26,-96.99 h1.15
  text "'.ProjectPCBFabNumber'_FAB-D" at 192.51,-99.99 h1.38
  text ".ProjectPCBFabRevision" at 209.188,-104.562 h1.5
TITLE MIRROR (M17):
  lines w0.1: -143.51,-87.49 -61.69,-87.49 ; -142.39,-104.625 -142.39,-103.355 ; -142.39,-103.99 -132.23,-103.99 ; -142.39,-102.79 -142.39,-101.79 ; -142.39,-102.29 -132.39,-102.29 ; -139.85,-104.625 -139.85,-103.355 ; -137.39,-102.59 -137.39,-101.99 ; -137.31,-104.625 -137.31,-103.355 ; -134.77,-104.625 -134.77,-103.355 ; -132.39,-102.79 -132.39,-101.79 ; -132.23,-104.625 -132.23,-103.355 ; -113.69,-79.99 -113.69,-82.99 -143.51,-82.99 ; -143.51,-82.99 -143.51,-82.99
  lines w0.127: -148.59,-50.165 -143.51,-50.165 ; -148.59,10.16 -143.51,10.16 ; -148.59,70.485 -143.51,70.485 ; -143.51,-100.99 -61.69,-100.99 ; -143.51,-94.99 -61.69,-94.99 ; -143.51,-88.99 -61.69,-88.99 ; -128.19,-105.41 -128.19,-94.99 ; -120.69,-105.41 -120.69,-100.99 ; -107.69,-100.99 -107.69,-94.99 ; -89.69,-105.41 -89.69,-88.99 ; -85.09,-110.49 -85.09,-105.41 ; -85.09,125.73 -85.09,130.81 ; -61.69,-105.41 -61.69,-79.99 ; -21.59,-110.49 -21.59,-105.41 ; -21.59,125.73 -21.59,130.81 ; 41.91,-110.49 41.91,-105.41 ; 41.91,125.73 41.91,130.81 ; 105.41,-110.49 105.41,-105.41 ; 105.41,125.73 105.41,130.81 ; 168.91,-110.49 168.91,-105.41 ; 168.91,125.73 168.91,130.81 ; 227.33,-50.165 232.41,-50.165 ; 227.33,10.16 232.41,10.16 ; 227.33,70.485 232.41,70.485 ; -143.51,-105.41 227.33,-105.41 227.33,125.73 -143.51,125.73 -143.51,-105.41 ; -143.51,-105.41 -27.69,-105.41 -27.69,-79.99 -143.51,-79.99 -143.51,-105.41 ; -148.59,-110.49 232.41,-110.49 232.41,130.81 -148.59,130.81 -148.59,-110.49
  lines w0.254: -143.51,121.23 -22.01,121.23 ; -124.01,116.73 -124.01,121.23 -124.01,125.73 ; -45.51,116.73 -45.51,121.23 -45.51,125.73 ; -33.01,116.73 -33.01,121.23 -33.01,125.73 ; -22.01,121.23 -22.01,125.73 -143.51,125.73 -143.51,116.73 -22.01,116.73 -22.01,121.23
  text "6" at -116.256,127.508 h1.78
  text "5" at -52.629,127.508 h1.78
  text "4" at 10.846,127.508 h1.78
  text "3" at 74.515,127.508 h1.78
  text "2" at 137.744,127.508 h1.78
  text "1" at 201.134,127.508 h1.78
  text "ECO" at -34.51,122.73 h1.52
  text "REV" at -24.51,122.73 h1.52
  text "Date" at -129.01,122.23 h1.52
  text "Comments" at -81.01,122.23 h1.52
  text "A" at -145.415,98.476 h1.78
  text "A" at 230.505,98.476 h1.78
  text "B" at -145.415,38.024 h1.78
  text "B" at 230.505,38.024 h1.78
  text "C" at -145.415,-22.301 h1.78
  text "C" at 230.505,-22.301 h1.78
  text "PART NUMBER:" at -114.69,-81.99 h1
  text "'.ProjectpartNumber'" at -126.69,-82.24 h1.5
  text "D" at -145.415,-82.499 h1.78
  text "TITLE:" at -62.69,-82.49 h1.14
  text "D" at 230.505,-82.499 h1.78
  text "'.ProjectTitle'" at -62.69,-86.49 h2.5
  text "GERBER FILE:" at -90.69,-90.99 h1.15
  text "PCB Layout Contact:" at -62.69,-90.99 h1.15
  text "'.Plot_File_Name'" at -90.69,-93.99 h1.5
  text ".ProjectContactPCB" at -62.69,-93.99 h1.6
  text "M" at -30.69,-95.99 h15.24
  text "DATE:" at -129.39,-96.99 h1.14
  text "PCB NUMBER:" at -90.69,-96.99 h1.15
  text "Project Owner:" at -62.69,-96.99 h1.15
  text "Microchip Technology Inc." at -29.46,-99.25 h1.78
  text "'.PRINT_DATE'" at -129.39,-99.99 h1.5
  text ".ProjectPCBAssyNumber" at -90.69,-99.99 h1.6
  text ".ProjectContactOwner" at -62.69,-99.99 h1.6
  text "2355 W. Chandler Blvd." at -30.69,-101.99 h1.78
  text "LAYER NAME:" at -90.69,-102.49 h1.14
  text "10mm" at -128.69,-102.59 h0.7
  text "REV:" at -121.44,-102.74 h1.14
  text "PCB FILE NAME:" at -62.69,-102.74 h1.15
  text "400mil" at -128.59,-104.29 h0.7
  text "Chandler, AZ  85224" at -31.69,-104.49 h1.78
  text "'.PCB_FILE_NAME_NO_PATH'" at -62.69,-104.74 h1
  text "6" at -116.256,-108.712 h1.78
  text "5" at -52.629,-108.712 h1.78
  text "4" at 10.846,-108.712 h1.78
  text "3" at 74.515,-108.712 h1.78
  text "2" at 137.744,-108.712 h1.78
  text "1" at 201.134,-108.712 h1.78

## Dimensions
2.54,0 to 2.54,2.54 on Drill Drawing
0,2.54 to 2.54,2.54 on Drill Drawing

## Text inside footprints (layer, text, board x,y; h text height)
LABEL1: Bottom Overlay "PCBA LABEL" at 76.811,9.536 h1.52